# EAGLE board eeZeePowerJack (EAGLE 6.4)
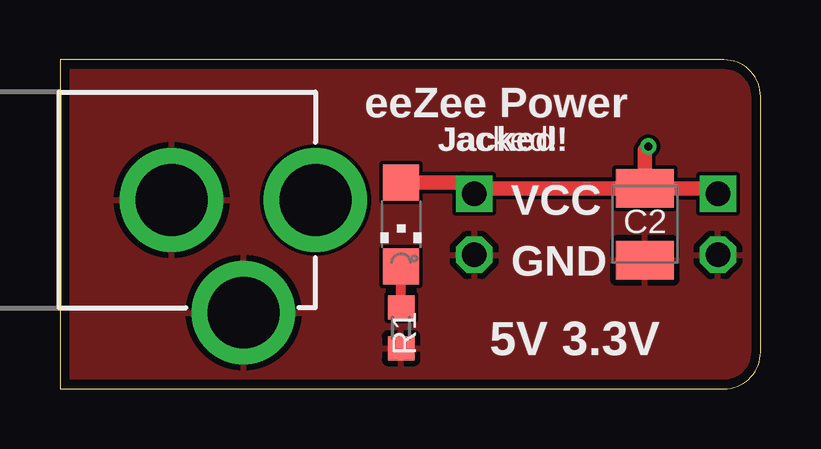
[diagram p0: board, top side]
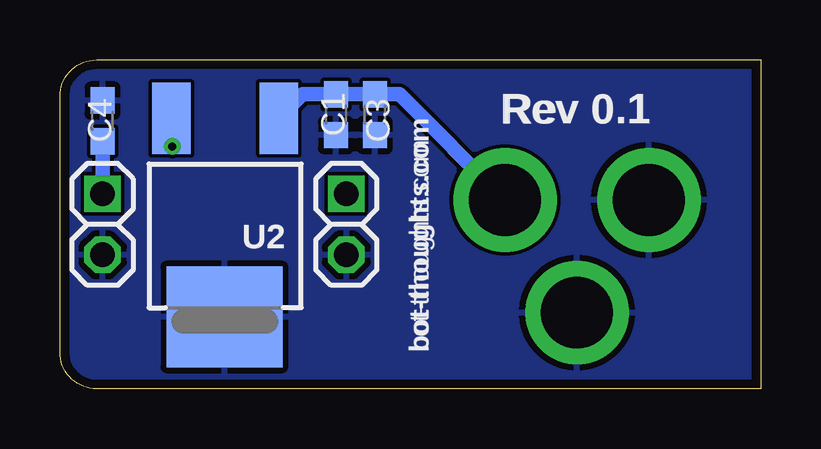
[diagram p1: board, bottom side, seen from below]

Size 29.21 x 13.72 mm. Coordinates in mm from the lower left corner, seen from the top.
Outline: 0,0 27.69,0 arc90 29.21,1.52 29.21,12.19 arc90 27.69,13.72 0,13.72 0,0
Copper layers (1*16): Top 0.0356mm / dielectric 1.5011mm / Bottom 0.0356mm
Design rules "LaenPCBOrder *": minimum track width 6mil, minimum drill 13mil, track to track 6mil, track to pad 6mil, pad to pad 6mil, via to via 6mil, smd to smd 6mil, copper to edge 15mil, drill to drill 6mil, minimum pad ring 7mil, minimum via ring 7mil, stop-mask expansion 4mil, vias tented up to drill 20mil, thermal gap 10mil

## Footprints (pad centres in the part's own frame; a part is rotated, then mirrored left to right if it is on the bottom)
C0603 = smd 1.1 x 1: 1 -0.85,0; 2 0.85,0
SMC_B = smd 1.6 x 2.4: + -1.5,0; - 1.5,0
POWER_JACK_PTH = drill 2.997 pad 4.318: GND 0,7.7; GNDBREAK 4.7,10.7; PWR 0,13.7
1X02-S = drill 1.016 square: 1 -1.27,0 | drill 1.016 octagon: 2 1.27,0
CHIPLED_1206 = smd 1.5 x 1.5: A 0,-1.75; C 0,1.75
R0603 = smd 1 x 1.1: 1 -0.85,0; 2 0.85,0
DPAK = smd 1.6 x 2.997: 1 -2.261,-3.658; 3 2.21,-3.658 | smd 4.826 x 4.191: 4 0,4.623

## Placement (x,y rotation side)
C1  0.1uF  [C0603]  17.71,11.43 270 bottom
C2  100uF  [SMC_B]  24.38,6.86 270 top
C3  10uF  [C0603]  16.08,11.43 270 bottom
C4  0.1uF  [C0603]  27.43,11.18 90 bottom
J1  POWER_JACKPTH  [POWER_JACK_PTH]  -3.05,7.87 270 top
JP3  [1X02-S]  17.27,6.86 270 bottom
JP4  [1X02-S]  27.43,6.86 270 bottom
LED1  [CHIPLED_1206]  14.22,6.86 180 top
R1  [R0603]  14.22,2.54 90 top
U2  LD29150DT  [DPAK]  22.35,7.62 180 bottom

## Library data of the parts
C1 C3 = rcl; VOLTAGE: 10V
C2 C4 = rcl
J1 = SparkFun-Connectors
JP3 JP4 = pinhead-2
LED1 = led
R1 = resistor
U2 = bt_regulator

## Nets
GND: C1.2 C2.- C3.2 C4.2 J1.GND J1.GNDBREAK JP3.2 JP4.2 R1.1 U2.4
N$5: LED1.C R1.2
VIN: C1.1 C3.1 J1.PWR U2.1
VOUT: C2.+ C4.1 JP3.1 JP4.1 LED1.A U2.3

## Tracks (layer width: path | path; a pad name or v marks a point on that pad's centre or on a via)
GND
  pour Top (rank 3): 0,13.72 27.69,13.72 arc-90 29.21,11.94 29.21,1.52 arc-90 27.69,0 0,0
  pour Bottom (rank 2): 0,13.72 27.69,13.72 arc-90 29.21,11.94 29.21,1.27 arc-90 27.69,0 0,0
N$5
  Top 0.406: R1.2 LED1.C
VIN
  Bottom 0.61: U2.1 19.09,12.28 C1.1 C3.1 15.06,12.28 J1.PWR
VOUT  (via drill 0.33)
  Top 0.61: C2.+ 17.5,8.36 JP3.1 16.79,8.61 LED1.A | C2.+ 27.2,8.36 JP4.1 | C2.+ 24.38,9.96 v24.53,10.11
  Bottom 0.61: C4.1 JP4.1 | v24.53,10.11 24.53,11.25 U2.3

## Text on the board
bPlace: Rev 0.1 | bot-thoughts.com
tNames: Jacked!
tValues: eeZee Power | VCC | GND | 5V 3.3V
tsilk: eeZee Power | Jacked! | VCC | GND | 5V 3.3V
bsilk: Rev 0.1 | U2 | bot-thoughts.com